# EAGLE board Serial I2C Bridge Prop (EAGLE 6.1)
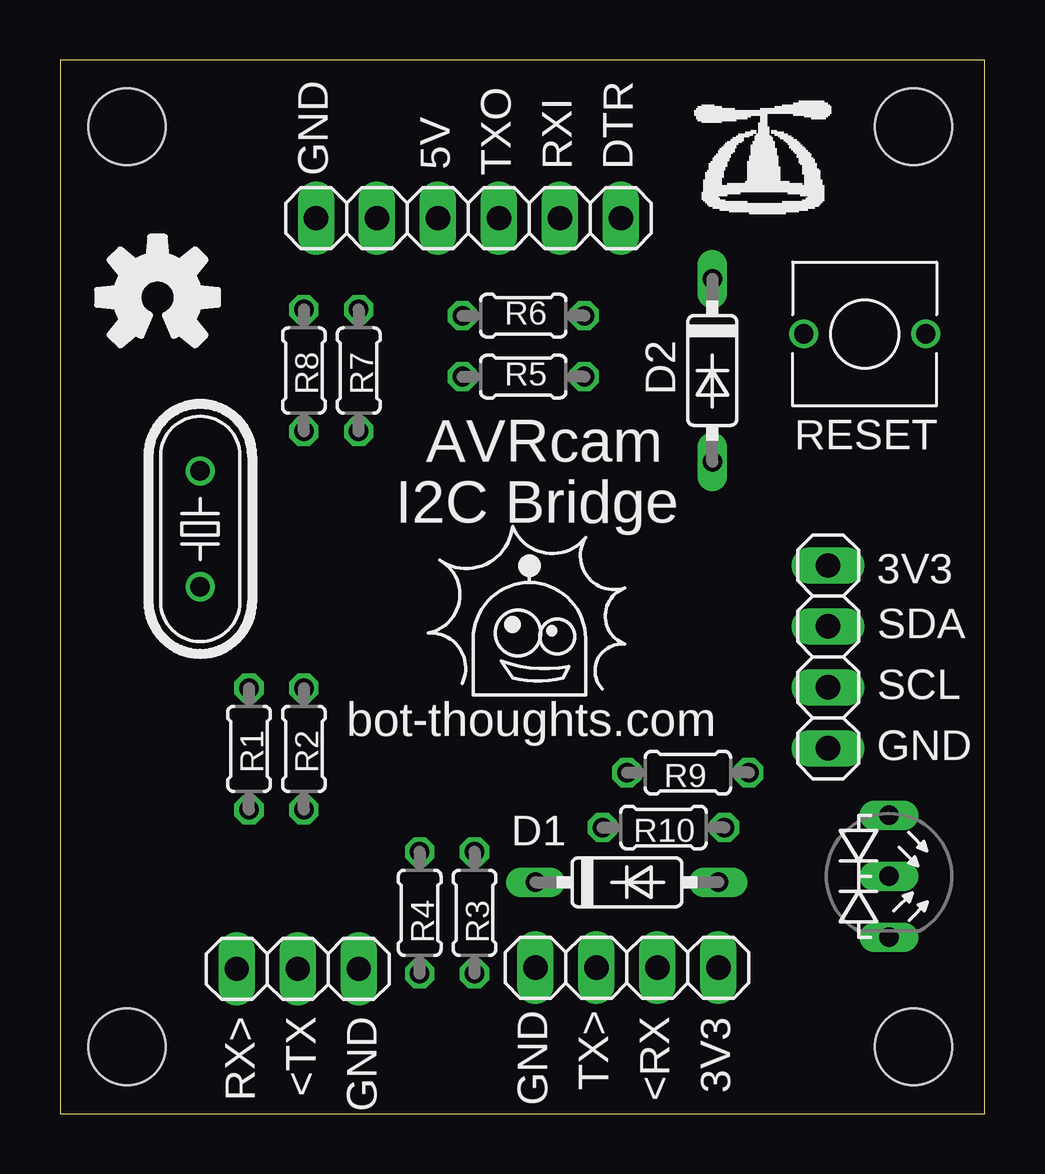
[diagram p0: board, top side]
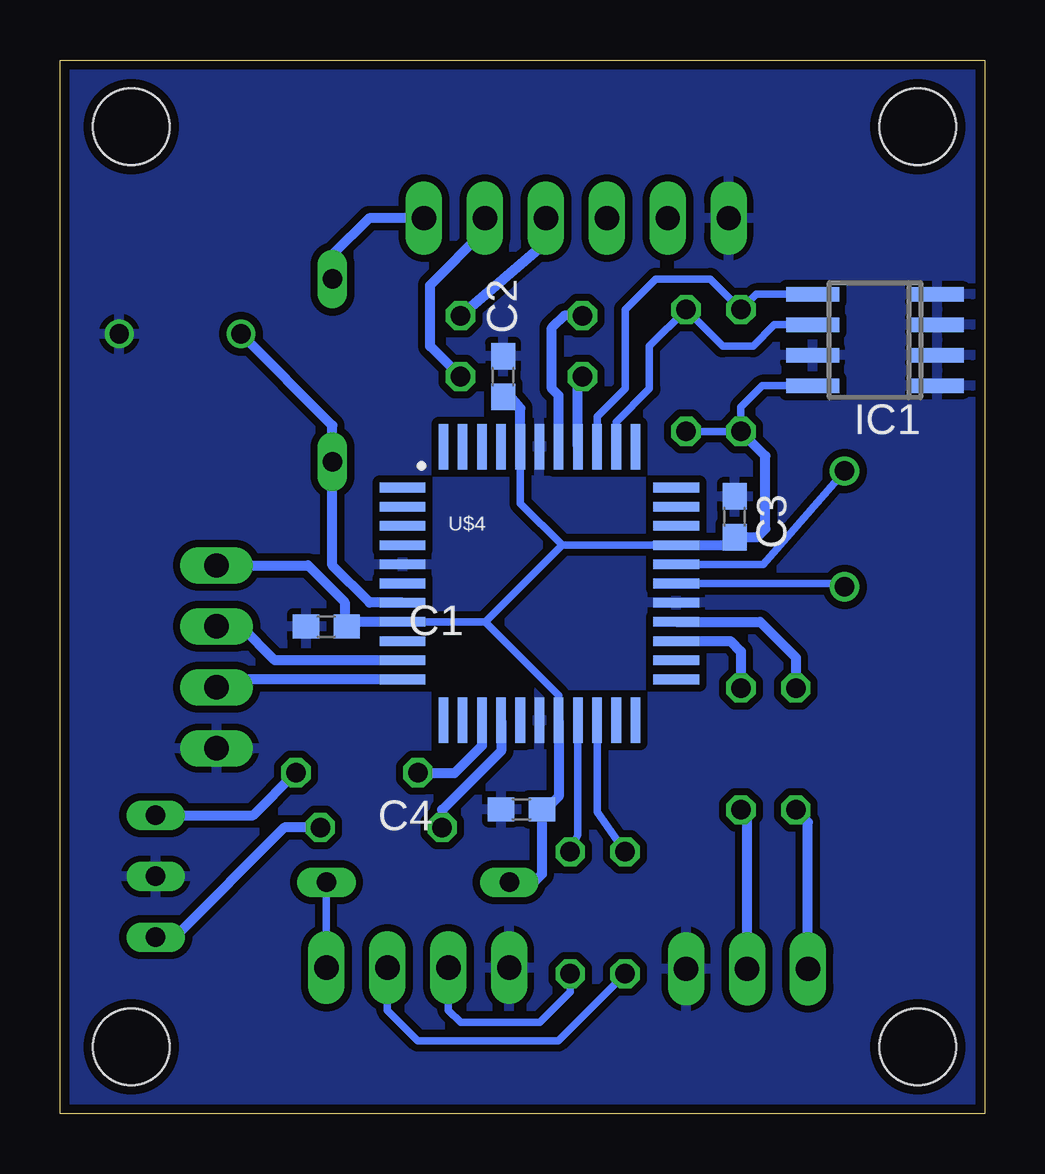
[diagram p1: board, bottom side, seen from below]

Size 38.53 x 43.93 mm. Coordinates in mm from the lower left corner, seen from the top.
Outline: 0,0 38.53,0 38.53,43.93 0,43.93 0,0
Copper layers (1*16): Top 0.0356mm / dielectric 1.5011mm / Bottom 0.0356mm
Design rules: minimum track width 6mil, minimum drill 13mil, track to track 6mil, track to pad 6mil, pad to pad 6mil, via to via 6mil, smd to smd 6mil, copper to edge 15mil, drill to drill 6mil, minimum pad ring 7mil, minimum via ring 7mil, stop-mask expansion 4mil, vias tented up to drill 0mil, thermal gap 10mil
Holes 3.2 mm at 2.79,41.15 35.56,41.15 35.56,2.79 2.79,2.79

## Footprints (pad centres in the part's own frame; a part is rotated, then mirrored left to right if it is on the bottom)
C0603 = smd 1.1 x 1: 1 -0.85,0; 2 0.85,0
DO35-7 = drill 0.813 long: A 3.81,0; C -3.81,0
DUOLED = drill 0.813 long: A1 -3.81,0; A2 1.27,0; K -1.27,0
SO-08 = smd 0.6 x 2.2: 1 -1.905,-2.6; 2 -0.635,-2.6; 3 0.635,-2.6; 4 1.905,-2.6; 5 1.905,2.6; 6 0.635,2.6; 7 -0.635,2.6; 8 -1.905,2.6
1X06 = drill 1.016 long: 1 -6.35,0; 2 -3.81,0; 3 -1.27,0; 4 1.27,0; 5 3.81,0; 6 6.35,0
1X03 = drill 1.016 long: 1 -2.54,0; 2 0,0; 3 2.54,0
1X04 = drill 1.016 long: 1 -3.81,0; 2 -1.27,0; 3 1.27,0; 4 3.81,0
HC49/S = drill 0.813: 1 -2.413,0; 2 2.413,0
0204/5 = drill 0.813 octagon: 1 -2.54,0; 2 2.54,0
6MMTACTILE = drill 0.8: P$1 -2.54,0; P$2 2.54,0
P8X32A-Q44 = smd 1.9 x 0.4: 1 -5.713,4.013; 2 -5.713,3.212; 3 -5.713,2.413; 4 -5.713,1.613; 5 -5.713,0.812; 6 -5.713,0.013; 7 -5.713,-0.787; 8 -5.713,-1.587; 9 -5.713,-2.388; 10 -5.713,-3.188; 11 -5.713,-3.987; 23 5.688,-3.987; 24 5.688,-3.188; 25 5.688,-2.388; 26 5.688,-1.587; 27 5.688,-0.787; 28 5.688,0.013; 29 5.688,0.812; 30 5.688,1.613; 31 5.688,2.413; 32 5.688,3.212; 33 5.688,4.013 | smd 0.4 x 1.9: 12 -4.013,-5.688; 13 -3.212,-5.688; 14 -2.413,-5.688; 15 -1.613,-5.688; 16 -0.812,-5.688; 17 -0.013,-5.688; 18 0.787,-5.688; 19 1.587,-5.688; 20 2.388,-5.688; 21 3.188,-5.688; 22 3.987,-5.688; 34 3.987,5.713; 35 3.188,5.713; 36 2.388,5.713; 37 1.587,5.713; 38 0.787,5.713; 39 -0.013,5.713; 40 -0.812,5.713; 41 -1.613,5.713; 42 -2.413,5.713; 43 -3.212,5.713; 44 -4.013,5.713

## Placement (x,y rotation side)
C1  [C0603]  27.43,20.32 180 bottom
C2  [C0603]  20.07,30.73 90 bottom
C3  [C0603]  10.41,24.89 90 bottom
C4  [C0603]  19.3,12.7 180 bottom
D1  1N4148  [DO35-7]  23.62,9.65 0 top
D2  1N4148  [DO35-7]  27.18,30.99 270 top
D3  [DUOLED]  34.54,8.64 270 top
IC1  24LC256SN  [SO-08]  4.57,32.26 90 bottom
JP1  FTDI  [1X06]  17.02,37.34 180 top
JP3  CAM  [1X03]  9.91,6.05 0 top
JP4  I2C  [1X04]  32,19.05 270 top
JP5  DIAG  [1X04]  23.62,6.1 180 top
Q1  5MHz  [HC49/S]  5.84,24.38 270 top
R1  1.8K  [0204/5]  7.87,15.21 270 top
R2  1.8K  [0204/5]  10.16,15.21 270 top
R3  1.8K  [0204/5]  17.27,8.38 270 top
R4  1.8K  [0204/5]  14.99,8.38 270 top
R5  1.8K  [0204/5]  19.3,30.73 0 top
R6  1.8K  [0204/5]  19.3,33.27 0 top
R7  10K  [0204/5]  12.45,30.99 270 top
R8  10K  [0204/5]  10.16,30.99 270 top
R9  390  [0204/5]  26.16,14.22 0 top
R10  390  [0204/5]  25.15,11.94 180 top
S1  RESET  [6MMTACTILE]  33.53,32.51 180 top
U$4  P8X32A-Q44  [P8X32A-Q44]  18.54,22.1 0 bottom

## Library data of the parts
C1-C4 R1-R10 = rcl
D1 D2 = diode
D3 = special
IC1 = microchip; MF: MICROCHIP; MPN: 24LC256-I/SN; OC_FARNELL: 9757996; OC_NEWARK: 27C9144
JP1 JP3-JP5 = pinhead-2
Q1 = mes_crystal; OC_FARNELL: 1667008; OC_NEWARK: unknown
S1 = mes_electromech
U$4 = parallax_propeller

## Nets
3.3V: C1.1 C2.1 C3.1 C4.1 D1.C IC1.8 JP4.1 R7.2 R8.2 U$4.8 U$4.18 U$4.30 U$4.40
5V: JP1.4
!RESET: D2.A S1.P$2 U$4.7
<RXI: JP3.1 R1.2
<RXI_D: JP5.2 R4.2
<RXI_D_LV: R4.1 U$4.20
<RXI_LV: R1.1 U$4.26
GND: C1.2 C2.2 C3.2 C4.2 D3.K IC1.1 IC1.2 IC1.3 IC1.4 IC1.7 JP1.6 JP3.3 JP4.4 JP5.4 S1.P$1 U$4.5 U$4.17 U$4.27 U$4.39
LED1: R9.1 U$4.14
LED2: R10.2 U$4.15
N$1: D2.C JP1.1
N$2: Q1.2 U$4.28
N$3: D1.A JP5.1
N$4: Q1.1 U$4.29
N$5: JP1.2 R5.2
N$6: JP1.3 R6.2
N$8: D3.A1 R9.2
N$9: D3.A2 R10.1
P28: IC1.6 R7.1 U$4.35
P29: IC1.5 R8.1 U$4.36
P30: R5.1 U$4.37
P31: R6.1 U$4.38
SCL: JP4.3 U$4.11
SDA: JP4.2 U$4.10
TXO>: JP3.2 R2.2
TXO_D>: JP5.3 R3.2
TXO_D_LV: R3.1 U$4.19
TXO_LV>: R2.1 U$4.25

## Tracks (layer width: path | path; a pad name or v marks a point on that pad's centre or on a via)
3.3V
  Bottom 0.305: U$4.40 19.36,25.45 17.61,23.71 | U$4.30 17.61,23.71 | U$4.8 20.81,20.51 | 20.81,20.51 17.61,23.71 | U$4.18 17.75,17.45 20.81,20.51 | R7.2 R8.2 10.16,29.46 9.27,30.35 IC1.8
  Bottom 0.406: U$4.30 10.41,23.71 C3.1 | C3.1 10.41,24.13 | C3.1 9.49,24.04 9.14,24.38 9.14,27.43 R8.2 | U$4.40 19.36,29.41 19.81,29.97 C2.1 | U$4.18 17.75,13.23 18.29,12.7 C4.1 18.45,9.99 18.8,9.65 D1.C | U$4.8 26.39,20.51 C1.1 26.67,20.41 26.67,21.34 28.19,22.86 JP4.1
!RESET
  Bottom 0.406: U$4.7 25.63,21.31 27.18,22.86 D2.A 27.18,28.7 S1.P$2
<RXI
  Bottom 0.406: JP3.1 7.37,12.17 R1.2
<RXI_D
  Bottom 0.305: R4.2 17.78,3.05 23.62,3.05 24.89,4.32 JP5.2
<RXI_D_LV
  Bottom 0.305: U$4.20 16.15,12.6 R4.1
<RXI_LV
  Bottom 0.406: U$4.26 9.36,20.51 7.87,19.02 R1.1
GND
  pour Bottom (isolate 0.305): 0,43.69 38.61,43.69 38.1,0 -0.25,0
LED1
  Bottom 0.406: U$4.14 20.95,15.34 22.1,14.2 23.37,14.2 | 23.37,14.2 23.62,14.2 | R9.1 23.39,14.22 23.37,14.2
LED2
  Bottom 0.406: U$4.15 20.15,15.13 22.61,12.67 R10.2
N$1
  Bottom 0.406: JP1.1 25.65,37.34 27.18,35.81 D2.C
N$2
  Bottom 0.305: U$4.28 6.21,22.11 Q1.2
N$3
  Bottom 0.305: JP5.1 D1.A
N$4
  Bottom 0.305: U$4.29 9.22,22.91 Q1.1
N$5
  Bottom 0.406: R5.2 23.11,32 23.11,34.54 20.83,36.83 JP1.2
N$6
  Bottom 0.406: R6.2 18.29,36.32 JP1.3
N$8
  Bottom 0.406: D3.A1 30.48,12.45 R9.2
N$9
  Bottom 0.406: R10.1 29.18,11.94 33.78,7.34 34.52,7.34 D3.A2
P28
  Bottom 0.305: U$4.35 15.35,28.84 13.97,30.23 13.97,32 R7.1 10.92,32 9.65,32 8.76,32.89 IC1.6
P29
  Bottom 0.305: U$4.36 16.15,29.06 14.99,30.23 14.99,33.53 13.72,34.8 11.43,34.8 R8.1 9.53,34.16 IC1.5
P30
  Bottom 0.406: U$4.37 16.95,30.54 R5.1
P31
  Bottom 0.406: R6.1 17.53,33.27 18.03,32.77 18.03,30.23 17.75,29.95 U$4.38
SCL
  Bottom 0.406: U$4.11 31.42,18.11 31.75,17.78 JP4.3
SDA
  Bottom 0.406: U$4.10 29.58,18.91 30.99,20.32 JP4.2
TXO>
  Bottom 0.406: JP3.2 9.91,12.42 R2.2
TXO_D>
  Bottom 0.305: R3.2 17.27,5.08 18.54,3.81 21.84,3.81 22.35,4.32 JP5.3
TXO_D_LV
  Bottom 0.305: U$4.19 16.95,11.62 R3.1
TXO_LV>
  Bottom 0.406: U$4.25 10.59,19.71 10.16,19.28 R2.1

## Text on the board
tPlace: GND | 5V | TXO | RXI | DTR | 3V3 | SDA | SCL | bot-thoughts.com | GND | RX> | <TX | GND | GND | TX> | <RX | 3V3
tNames: RESET | AVRcam | I2C Bridge